# Altium PCB QXZ-v1.0.PcbDoc
Units mil, origin at the board's own origin, x right, y up, seen from the top; angles counter-clockwise.
Board outline 1371 x 2342 mil, 2 copper layers (Top Layer, Bottom Layer); 26 components, 19 nets, 91 pads, 34 vias.
Unrouted connection lines stored in the file: 31.
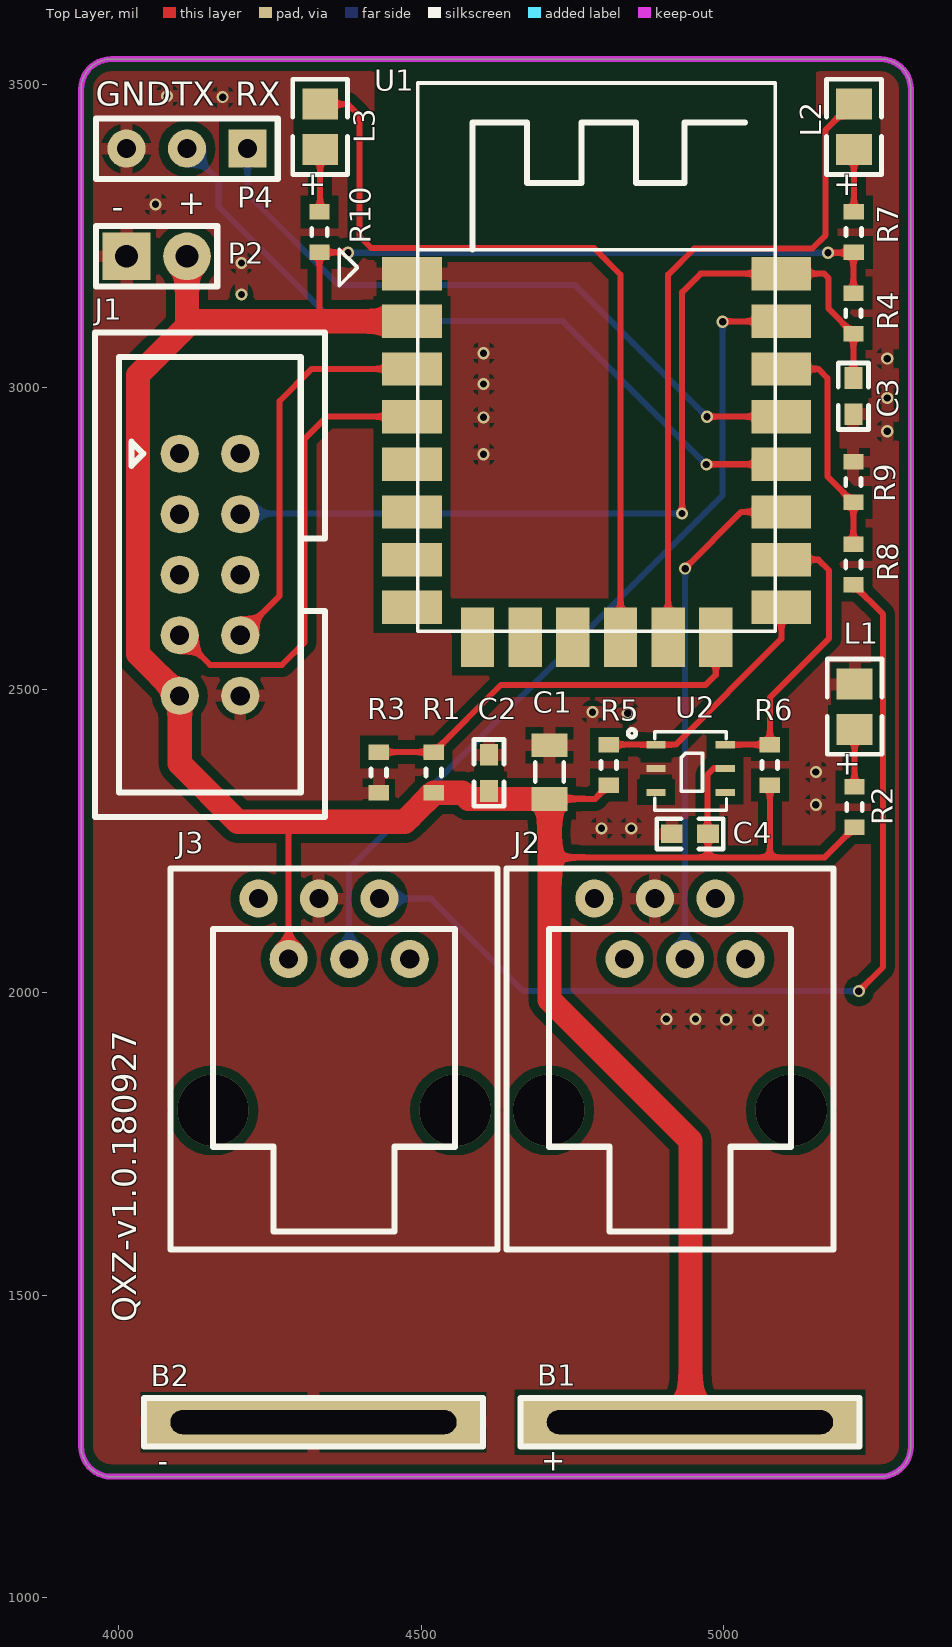
[diagram p0: Top Layer view]
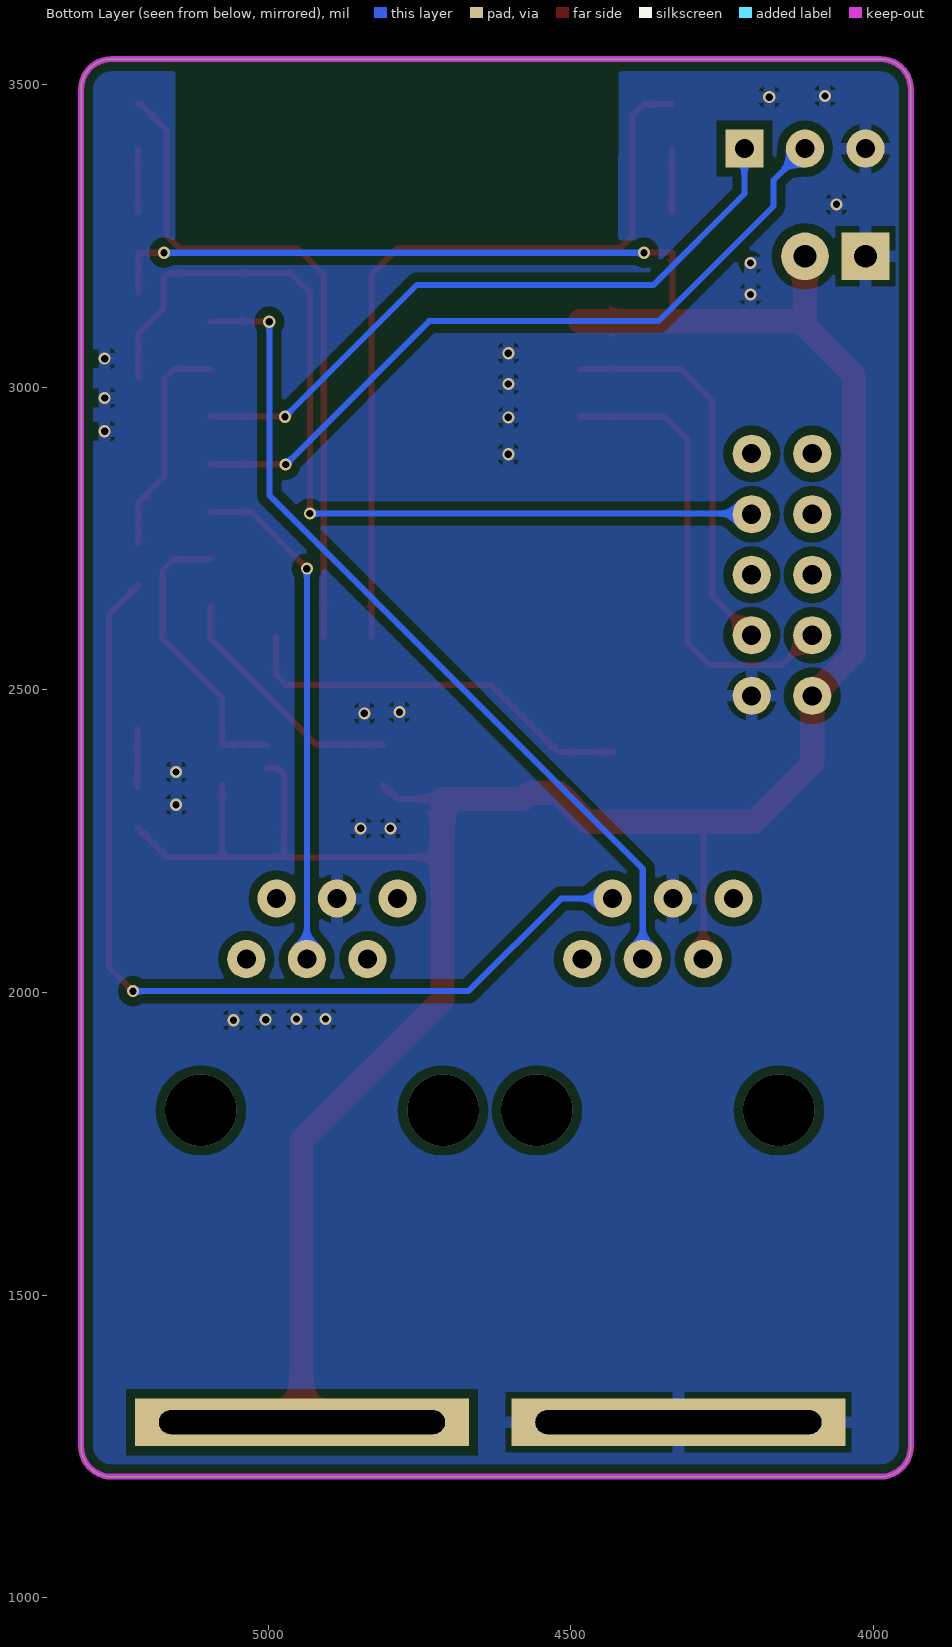
[diagram p1: Bottom Layer view, seen from below]

## Layer stack, top to bottom
Top Solder: solder mask 0.4, Solder Resist, Dk 3.5
Top Layer: signal copper 1.4
Dielectric 1: dielectric 12.6, FR-4, Dk 4.8
Bottom Layer: signal copper 1.4
Bottom Solder: solder mask 0.4, Solder Resist, Dk 3.5

## Board outline
3938,1250 3938,1290 3938,3492 cw(c3988,3492) 3988,3542 5259,3542 cw(c5259,3492) 5309,3492 5309,1250 cw(c5259,1250) 5259,1200 3988,1200 cw(c3988,1250)

## Design rules (kind name [scope] priority, off if disabled: settings)
Clearance Clearance_1 [InPolygon] p1: gap=15 ignorepadtopadclearanceinfootprint=FALSE
Clearance [All] p2: gap=8 ignorepadtopadclearanceinfootprint=FALSE
HoleSize [All] p1: absolutevalues=TRUE maxlimit=2000 minlimit=1 maxpercent=80.000 minpercent=20.000
HoleToHoleClearance [All] p1: gap=0 allowstackedmicrovias=TRUE
MinimumSolderMaskSliver [All] p1: minsoldermaskwidth=0
PolygonConnect [All] p1: connectstyle=Relief reliefconductorwidth=20 reliefentries=4 polygonreliefangle="90 Angle" airgapwidth=10
RoutingVias [All] p1: holewidth=12 width=20 viastyle="Through Hole" minholewidth=12 minwidth=20 maxholewidth=12 maxwidth=20
SilkToSilkClearance [All] p1: silktosilkclearance=0
SilkToSolderMaskClearance [IsPad] p1: minsilkscreentomaskgap=0 clearancetoexposedcopper=TRUE
SolderMaskExpansion [All] p1: expansion=4
UnRoutedNet [All] p1: checkbadconnections=TRUE
Width [All] p1: maxlimit=40 minlimit=10 preferedwidth=25
24 further rules are at their usual default settings.

## Components (designator, comment, footprint, x,y, rotation, side; value= is the part's Value field where it differs from the comment)
B1 "+" BatteryContacts-5# 4944,1290 r180 top
B2 "-" BatteryContacts-5# 4322,1290 r180 top
C1 "47uF" CAP(0805) 4712,2364 r270 top
C2 "104" CAP(0603) 4612,2362.54 r270 top
C3 "100nF" CAP(0603) 5214,2985 r270 top
C4 "100nF" CAP(0603) 4944,2262 r0 top
J1 "JTAG-10" JTAG-10 4101,2690 r0 top
J2 "RJ12-6P6C" RJ12-6P6C-up 4911,2105 r180 top
J3 "RJ12-6P6C" RJ12-6P6C-up 4356,2105 r180 top
L1 "LED" led0805 5216,2472 r90 top
L2 "LED" led0805 5215,3430 r90 top
L3 "LED" led0805 4333,3430 r90 top
P2 "Header2" Header2 4013,3216 r0 top
P4 "USART0" HEADER3 4213,3394 r180 top
R1 "10K" RES0603 4520.77,2363.46 r270 top
R2 "1K" RES0603 5216,2306 r270 top
R3 "10K" RES0603 4430,2363.46 r90 top
R4 "10K" RES0603 5214,3122 r90 top
R5 "4.7K" RES0603 4810,2376 r270 top
R6 "4.7K" RES0603 5076,2376 r270 top
R7 "1K" RES0603 5214.8,3256.09 r90 top
R8 "10K" RES0603 5214,2707 r90 top
R9 "10K" RES0603 5214,2843 r90 top
R10 "1K" RES0603 4331.8,3256.09 r90 top
U1 "ZA2530" ZA2530A 4484.76,3187.48 r0 top
U2 "HTU21D" DFN6 4945,2370 r0 top

## Footprints (in the part's own frame and the unit in brackets; to place one, negate y for a bottom-side part, rotate by r counter-clockwise, add the part's x,y. Pads: shape width x height; smd on the part's side, far side on the other; paste and mask are expansions set on the pad)
BatteryContacts-5# [mm]
  rect 14x2 hole 1 slot 12 at 0 deg: 1(0,0)
  silkscreen extent -7.11,-1.02 7.11,1.02
CAP(0603) [mil]
  rect 36x30 smd: 1(-30,0) 2(30,0)
  silkscreen extent -55,-25 55,25, body extent -31,-16 31,16, height 12
CAP(0805) [mm]
  rect 1x1.5 smd: 1(-1.125,0) 2(1.125,0)
  silkscreen extent -0.4,-0.6 0.4,0.6, body extent -1,-0.64 1,0.62, height 0.77
DFN6 [mil]
  rect 31.9x11.8 smd: 1(-57.1,39.2) 2(-57.1,-0.2) 3(-57.1,-39.5) 4(57.1,-39.5) 5(57.1,-0.2) 6(57.1,39.2)
  silkscreen extent -103,-69 59,64
Header2 [mm]
  rect 2x2 hole 0.95: 1(0,0)
  round 2 hole 0.95: 2(2.54,0)
  silkscreen extent -1.27,-1.27 3.81,1.27, body extent -1.27,-1.27 3.81,1.27, height 8.54
HEADER3 [mm]
  rect 1.6x1.6 hole 0.8: 1(0,0)
  round 1.6 hole 0.8: 2(2.54,0) 3(5.08,0)
  silkscreen extent -1.27,-1.27 6.35,1.27, body extent -1.27,-1.27 6.35,1.27, height 8.54
JTAG-10 [mm]
  round 1.6 hole 0.8: 1(0,5.08) 2(2.54,5.08) 3(0,2.54) 4(2.54,2.54) 5(0,0) 6(2.54,0) 7(0,-2.54) 8(2.54,-2.54) 9(0,-5.08) 10(2.54,-5.08)
  silkscreen extent -3.56,-10.16 6.1,10.16
led0805 [mm]
  rect 1.3x1.5 smd: 1(-0.95,0) 2(0.95,0)
  silkscreen extent -2,-1.15 2,1.15, body extent -1.03,-0.46 1.03,0.45, height 0.85
RES0603 [mm] "Chip Resistor, 2-Leads, Body 1.60x0.80mm, IPC Medium Density"
  rect 0.65x0.85 smd: 1(-0.85,0) 2(0.85,0)
  silkscreen extent -0.15,-0.33 0.15,0.33, body extent -0.8,-0.4 0.8,0.4, height 0.45
RJ12-6P6C-up [mm]
  round 1.6 hole 0.8: 1(3.175,-1.27) 2(1.905,1.27) 3(0.635,-1.27) 4(-0.635,1.27) 5(-1.905,-1.27) 6(-3.175,1.27)
  silkscreen extent -6.86,-2.54 6.86,13.46
ZA2530A [mm]
  rect 2.5x1.4 smd: 1(0,0) 2(0,-2) 3(0,-4) 4(0,-6) 5(0,-8) 6(0,-10) 7(0,-12) 8(0,-14) 15(15.5,-14) 16(15.5,-12) 17(15.5,-10) 18(15.5,-8) 19(15.5,-6) 20(15.5,-4) 21(15.5,-2) 22(15.5,0)
  rect 1.4x2.5 smd: 9(2.75,-15.25) 10(4.75,-15.25) 11(6.75,-15.25) 12(8.75,-15.25) 13(10.75,-15.25) 14(12.75,-15.25)
  silkscreen extent -3.05,-15 15.25,8

## Part data
B1 B2: library part BatteryContacts-5#
C1: library part Cap0805
C2 C3 C4: library part Cap0603
J2 J3: library part RJ12-6P6C-up
L1 L2 L3: library part LED0805
P4: library part Header3
R1 R2 R3 R4 R5 R6 R7 R8 R9 R10: library part RES0603
U1: library part ZA2530A
U2: library part htu21d

## Via types
v1: diameter 20, hole 12, Top Layer to Bottom Layer, tented both sides, 30 vias
v2: diameter 118.11, hole 118.11, Top Layer to Bottom Layer, 4 vias

## Nets (pads, with @x,y where several pads share a name; then routed paths per layer and width w, separated by ;. In a path a pad name is that pad's centre, name@x,y a point inside that pad or via, vN(x,y) a via of type N, cw(c..) or ccw(c..) an arc to the next point about the centre after c; other vN are vias at no path point)
DC: J1.8 U1.3 | length 654.6
  Top Layer w10: J1.8 4266,2655 4266,2977 4319,3030 U1.3
DD: J1.7 U1.4 | length 770.8
  Top Layer w10: J1.7 4102,2590 4151,2541 4270,2541 4307,2578 4307,2914 4344.26,2951.26 U1.4
GND: B2.1 C1.1 C2.1 C3.2 C4.1 J1.10 J2.3 J3.3 L1.2 P2.1 P4.3 R3.1 R9.2 U1.1 U2.2
  other v1: 5057,1954 5004,1955 4905,1956 4953,1956 4798,2271 4847,2271 5152,2310 5152,2364 4841,2461 4783,2463 4603,2889 5270,2927 4603,2950 5270,2982 4603,3005 5270,3047 4603,3056 4203,3153 4203,3205 4061,3302 4172,3479 4080,3481
NetJ3_5: J3.5 R8.1 | length 1560.8
  Top Layer w10: R8.1 5263,2624.54 5263,2042 v1(5223,2002)
  Bottom Layer w10: J3.5@4434,2155 4516,2155 4669,2002 v1(5223,2002)
NetL1_1: L1.1 R2.1 | length 95.1
  Top Layer w10: R2.1 L1.1
NetL2_1: L2.1 R7.2 | length 103.2
  Top Layer w10: R7.2 5214.8,3392.6 L2.1
NetL3_1: L3.1 R10.2 | length 104.2
  Top Layer w10: R10.2 4333,3289.56 L3.1
P00: J3.4 U1.21 | length 1405.9
  Top Layer w10: v1(4998,3108) 4998.74,3108.74 U1.21
  Bottom Layer w10: J3.4 4381,2204 4998,2821 v1(4998,3108)
P01/ADC1: R8.2 R9.1 U1.20 | length 374.6
  Top Layer w10: U1.20 5156,3030 5171,3015 5171,2852.54 R9.1 R8.2
P02/RXD0: P4.1 U1.19 | length 1109.5
  Top Layer w10: v1(4972,2951) 4972.26,2951.26 U1.19
  Bottom Layer w10: P4.1 4213,3319 4363,3169 4754,3169 v1(4972,2951)
P03/TXD0: P4.2 U1.18 | length 1223.6
  Top Layer w10: v1(4971,2872) 4971.52,2872.52 U1.18
  Bottom Layer w10: P4.2 4165,3342 4165,3299 4355,3109 4734,3109 v1(4971,2872)
P04: J2.4 U1.17 | length 843.4
  Top Layer w10: v1(4936,2700) 4936,2701 5028.78,2793.78 U1.17
  Bottom Layer w10: J2.4 v1(4936,2700)
P05: R6.1 U1.16 U2.6 | length 488.6
  Top Layer w10: U2.6 5075.74,2409.2 R6.1 5076,2487 5174,2585 5174,2697 5155.96,2715.04 U1.16
P06: R5.1 U1.15 U2.1 | length 409.8
  Top Layer w10: R5.1 4887.64,2409.46 U2.1 4920.2,2409.2 5095,2584 U1.15
P07/ADC7: R1.1 R3.2 U1.14 | length 672
  Top Layer w10: R3.2 R1.1 4631.84,2508 4970,2508 4986.73,2524.73 U1.14
P10: L2.2 U1.13 | length 1124.4
  Top Layer w10: U1.13 4907.99,3185.99 4951,3229 5146,3229 5168,3251 5168,3425 5210.4,3467.4 L2.2
P11: L3.2 U1.12 | length 1328.2
  Top Layer w10: L3.2 4378.6,3467.4 4398,3448 4398,3249 4417,3230 4785,3230 4829.25,3185.75 U1.12
RST: C3.1 J1.4 R4.1 U1.22 | length 1536.1
  Top Layer w10: v1(4931,2791) 4931,3157 4961.48,3187.48 U1.22 5165.52,3187.48 5173,3180 5173,3129.54 R4.1 C3.1
  Bottom Layer w10: J1.4 4202,2791 v1(4931,2791)
VCC3.3V: B1.1 C1.2 C2.2 C4.2 J1.9 J3.2 P2.2 R1.2 R2.2 R4.2 R5.2 R6.2 R7.1 R10.1 U1.2 U2.5 | length 5300.7
  Top Layer w10: J3.2 4281,2273 4278,2276 4284,2282 ; 4331,3108.74 4331.8,3109.54 R10.1 4378.37,3222.63 v1(4379,3222) ; 4712,2223 4974,2223 ; C1.2 4787.17,2319.71 R5.2 ; U2.5 5000.9,2371 4984,2371 4973.15,2360.15 4973.15,2262.85 C4.2 4974,2223 ; R6.2 5076,2223 ; v1(5172,3222) 5213.83,3222 5214,3221.83 R4.2 ; R2.2 5166.46,2223 5076,2223 ; 4974,2223 5076,2223
  Top Layer w40: P2.2 4113,3101 ; U1.2 4331,3108.74 4120.74,3108.74 4113,3101 ; B1.1@4929,1289 4945,1305 4945,1755 4712,1988 4712,2223 C1.2 4578,2319.71 4567.71,2330 R1.2 4472.77,2282 4284,2282 4197,2282 4101,2378 J1.9 4032,2559 4032,3020 4113,3101
  Bottom Layer w10: v1(4379,3222) v1(5172,3222)
pads on no net: J1.1 J1.2 J1.3 J1.5 J1.6 J2.1 J2.2 J2.5 J2.6 J3.1 J3.6 U1.5 U1.6 U1.7 U1.8 U1.9 U1.10 U1.11 U2.3 U2.4
copper on no net:
  other v2: 4156,1805 4556,1805 4711,1805 5111,1805

## Polygon pours and split planes (outlines as drawn)
GND on Top Layer "Top Layer-No Net" (solid, remove dead copper, pour order 6): 3938,1250 3938,1290 3938,3492 cw(c3988,3492) 3988,3542 5259,3542 cw(c5259,3492) 5309,3492 5309,1250 cw(c5259,1250) 5259,1200 3988,1200 cw(c3988,1250)
GND on Bottom Layer "Top Layer-No Net1" (solid, remove dead copper, pour order 7): 3938,1250 3938,1290 3938,3492 cw(c3988,3492) 3988,3542 5259,3542 cw(c5259,3492) 5309,3492 5309,1250 cw(c5259,1250) 5259,1200 3988,1200 cw(c3988,1250)

## Keep-outs
Keep-Out Layer:
  lines w10: 3938,1250 ccw(c3988,1250) 3988,1200 5259,1200 ccw(c5259,1250) 5309,1250 5309,3492 ccw(c5259,3492) 5259,3542 4470,3542 3988,3542 ccw(c3988,3492) 3938,3492 3938,1290 3938,1250

## Other copper
Top Layer:
  pour cut-out: 5153,3520 5153,3206 4422,3206 4422,3520
Bottom Layer:
  pour cut-out: 4421,3520 5153,3520 5153,3206 4422,3206

## Silkscreen, mask and mechanical layers (free items; w line width, h text height)
Top Overlay:
  text "GND" at 3962,3465 h40
  text "TX" at 4089,3465 h40
  text "RX" at 4193,3465 h40
  text "+" at 4098,3286 h40
  text "-" at 3989,3279 h40
  text "QXZ-v1.0.180927" at 4029,1455 h40 r90

## Text inside footprints (layer, text, board x,y; h text height)
L1: Top Overlay "+" at 5227,2393.26 h40 r180
L2: Top Overlay "+" at 5226,3351.26 h40 r180
L3: Top Overlay "+" at 4344,3351.26 h40 r180
U1: Mechanical 6 "17" at 5075,2793.78 h25; Mechanical 6 "16" at 5075,2715.04 h25; Mechanical 6 "8" at 4464.76,2636.3 h25; Mechanical 6 "9" at 4583.03,2587.09 h25; Mechanical 6 "10" at 4651.77,2587.09 h25; Mechanical 6 "11" at 4730.51,2587.09 h25; Mechanical 6 "20" at 5075,3030 h25; Mechanical 6 "21" at 5075,3108.74 h25; Mechanical 6 "22" at 5075,3187.48 h25; Mechanical 6 "18" at 5075,2872.52 h25; Mechanical 6 "19" at 5075,2951.26 h25; Mechanical 6 "14" at 4966.73,2587.09 h25; Mechanical 6 "13" at 4887.99,2587.09 h25; Mechanical 6 "12" at 4809.25,2587.09 h25; Mechanical 6 "5" at 4464.76,2872.52 h25; Mechanical 6 "7" at 4464.76,2715.04 h25; Mechanical 6 "6" at 4464.76,2793.78 h25; Mechanical 6 "15" at 5075,2636.3 h25; Mechanical 6 "4" at 4464.76,2951.26 h25; Mechanical 6 "3" at 4464.76,3030 h25; Mechanical 6 "2" at 4464.76,3108.74 h25; Mechanical 6 "1" at 4464.76,3187.48 h25